# Altium PCB PCB1.PcbDoc
Units mil, origin at the board's own origin, x right, y up, seen from the top; angles counter-clockwise.
Board outline 2570 x 1780 mil, 2 copper layers (Top Layer, Bottom Layer); 44 components, 24 nets, 125 pads, 22 vias.
Unrouted connection lines stored in the file: 1.
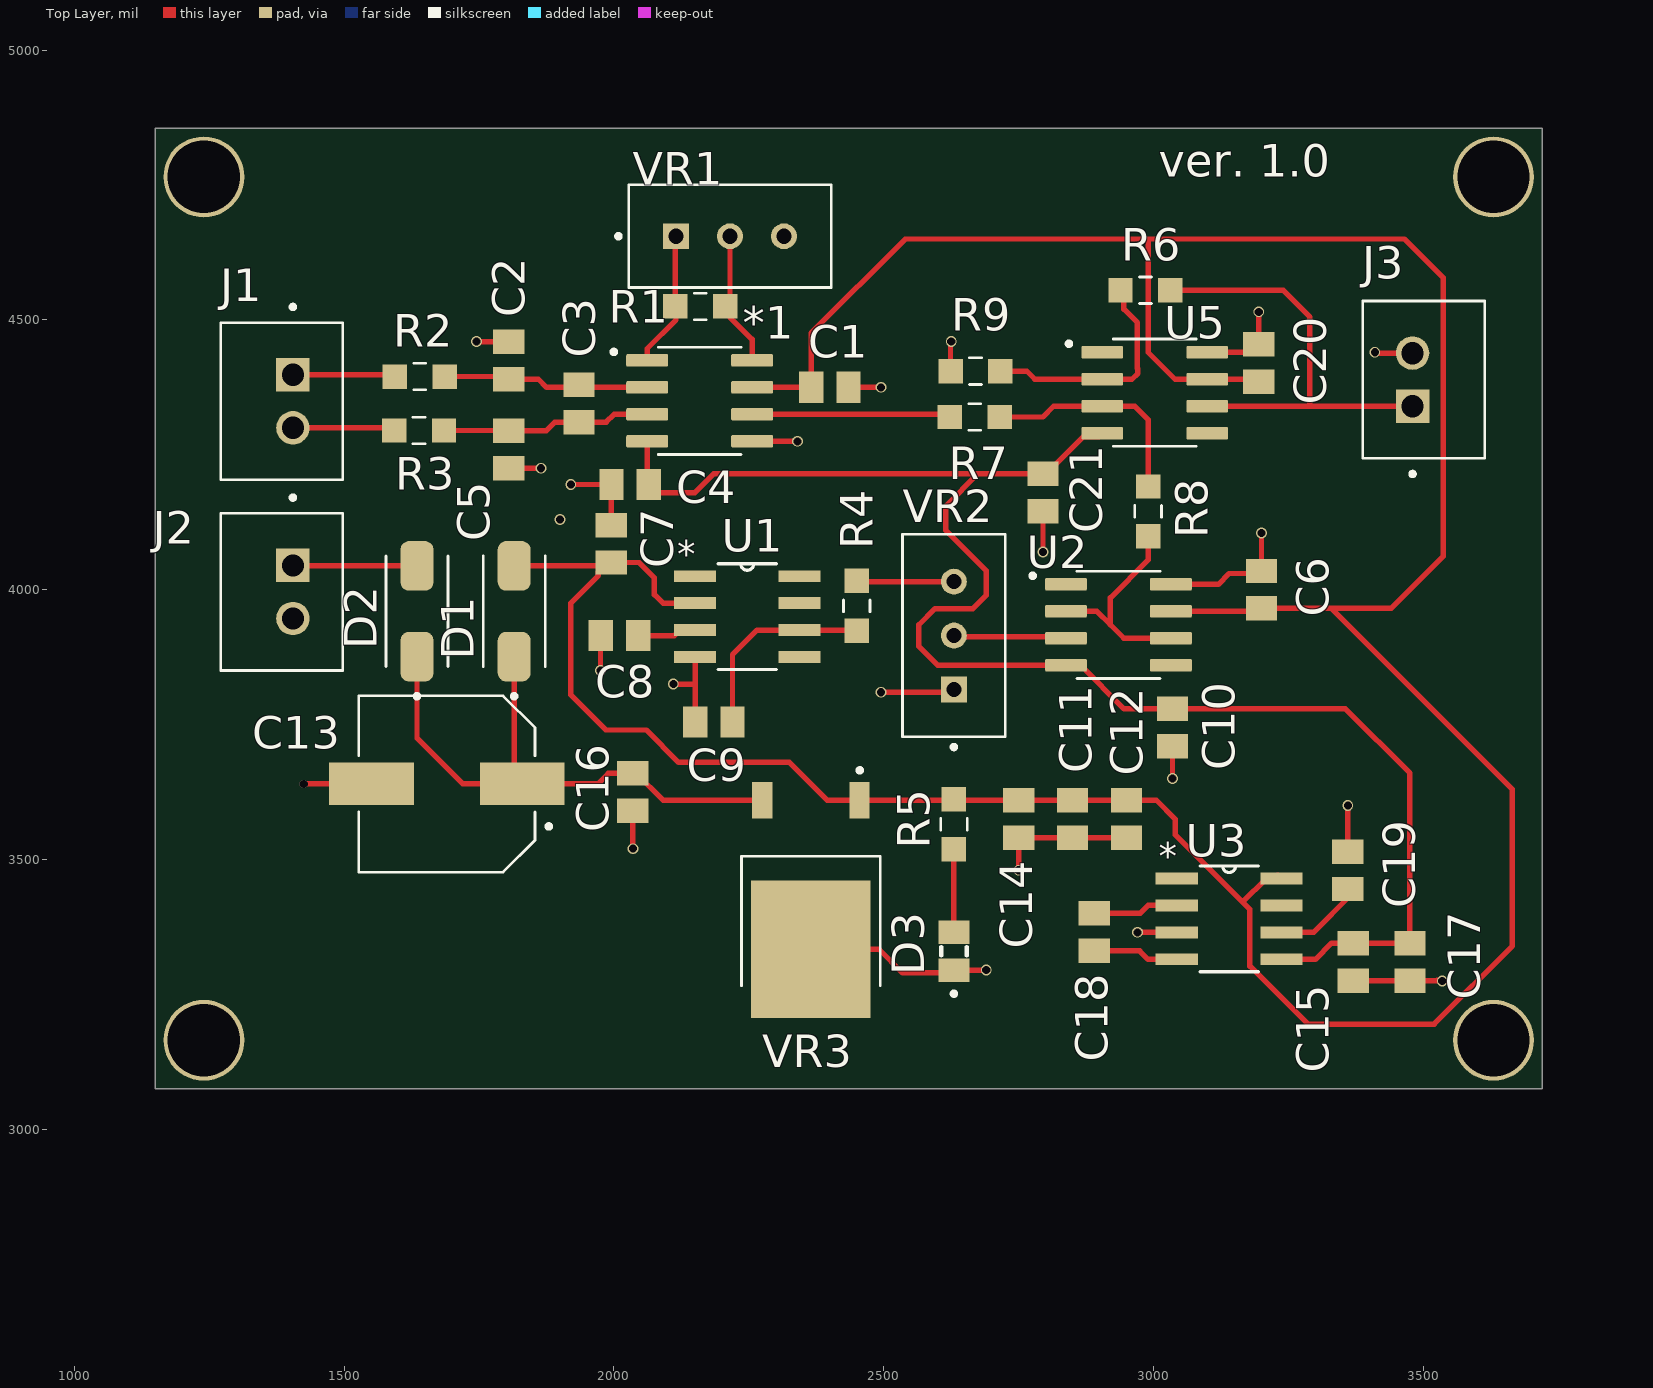
[diagram p0: Top Layer view]
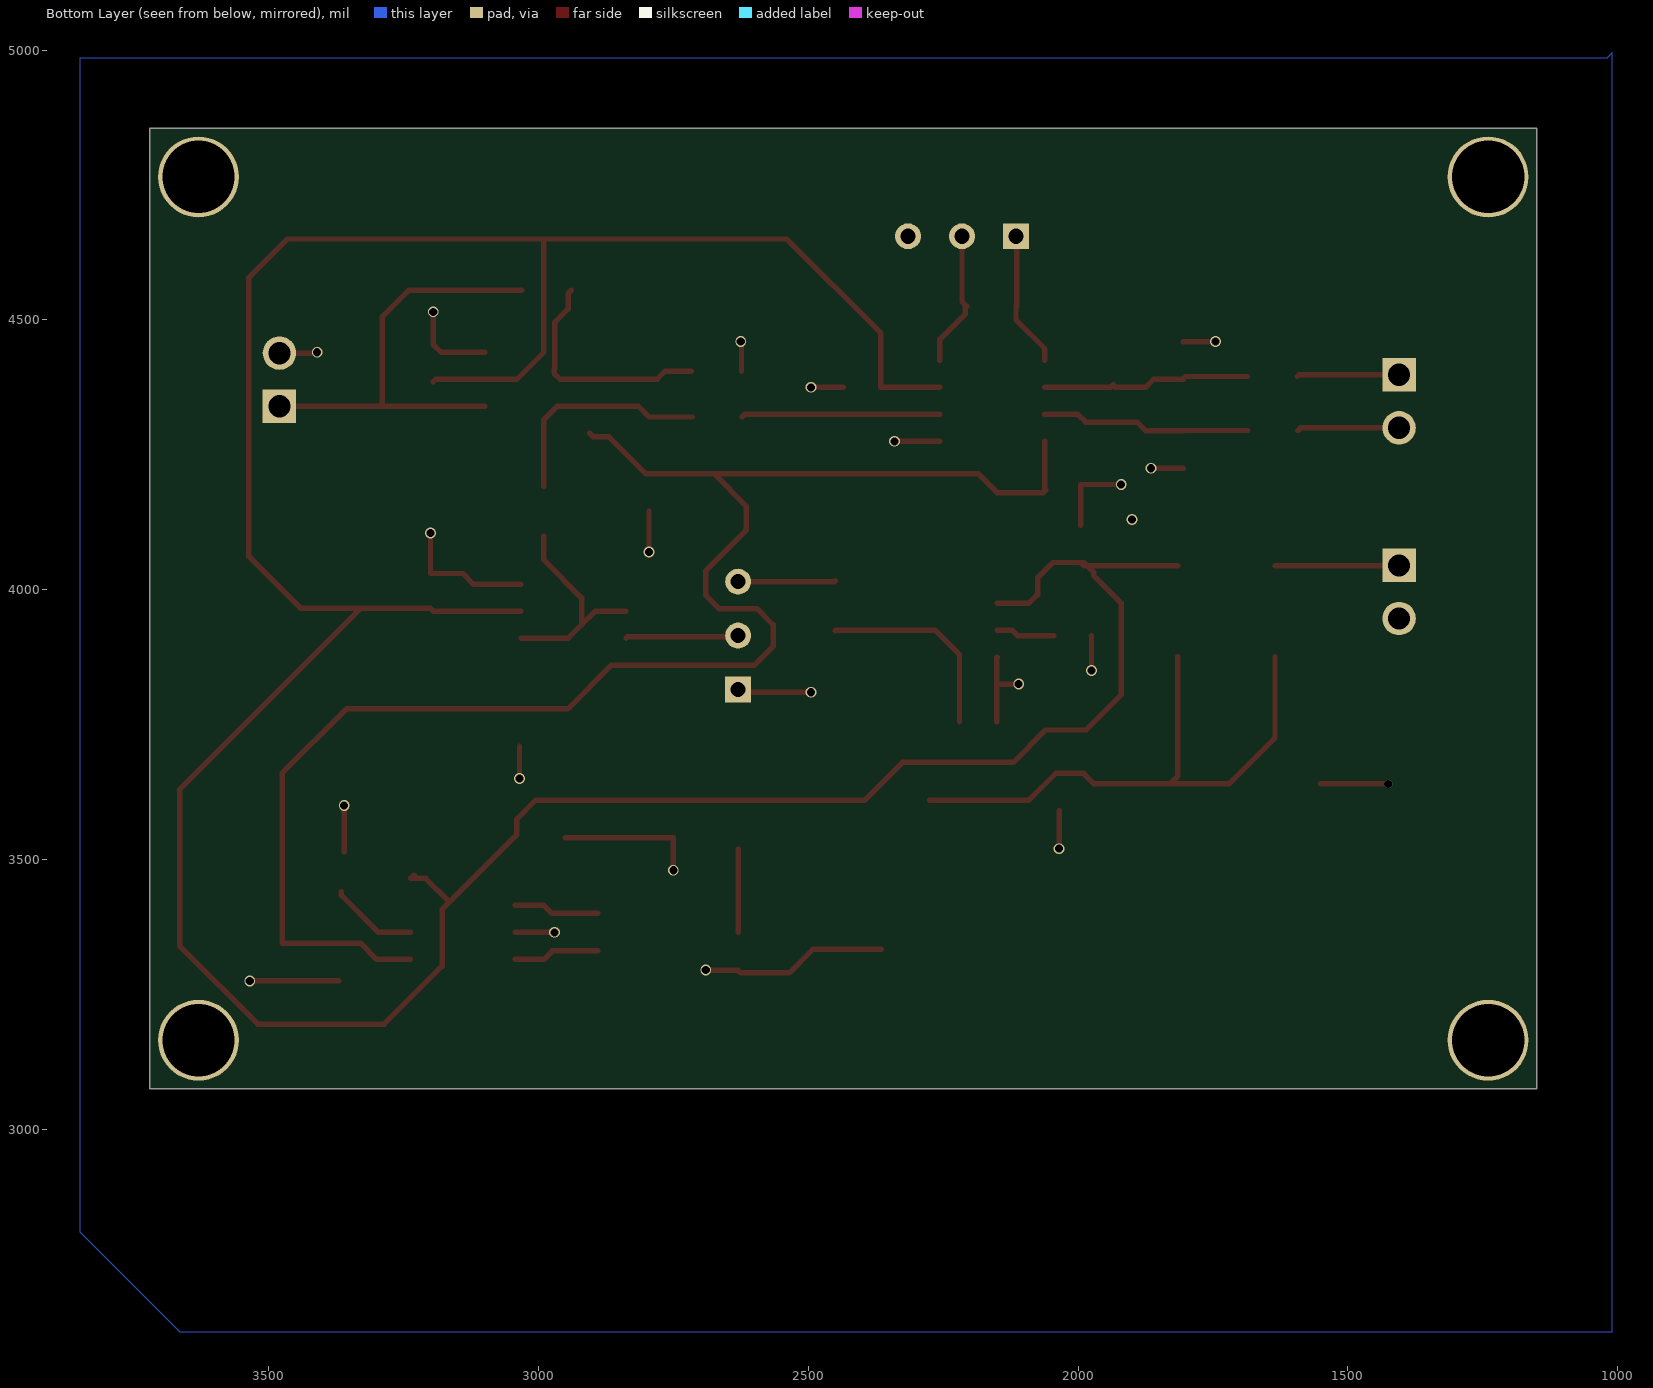
[diagram p1: Bottom Layer view, seen from below]
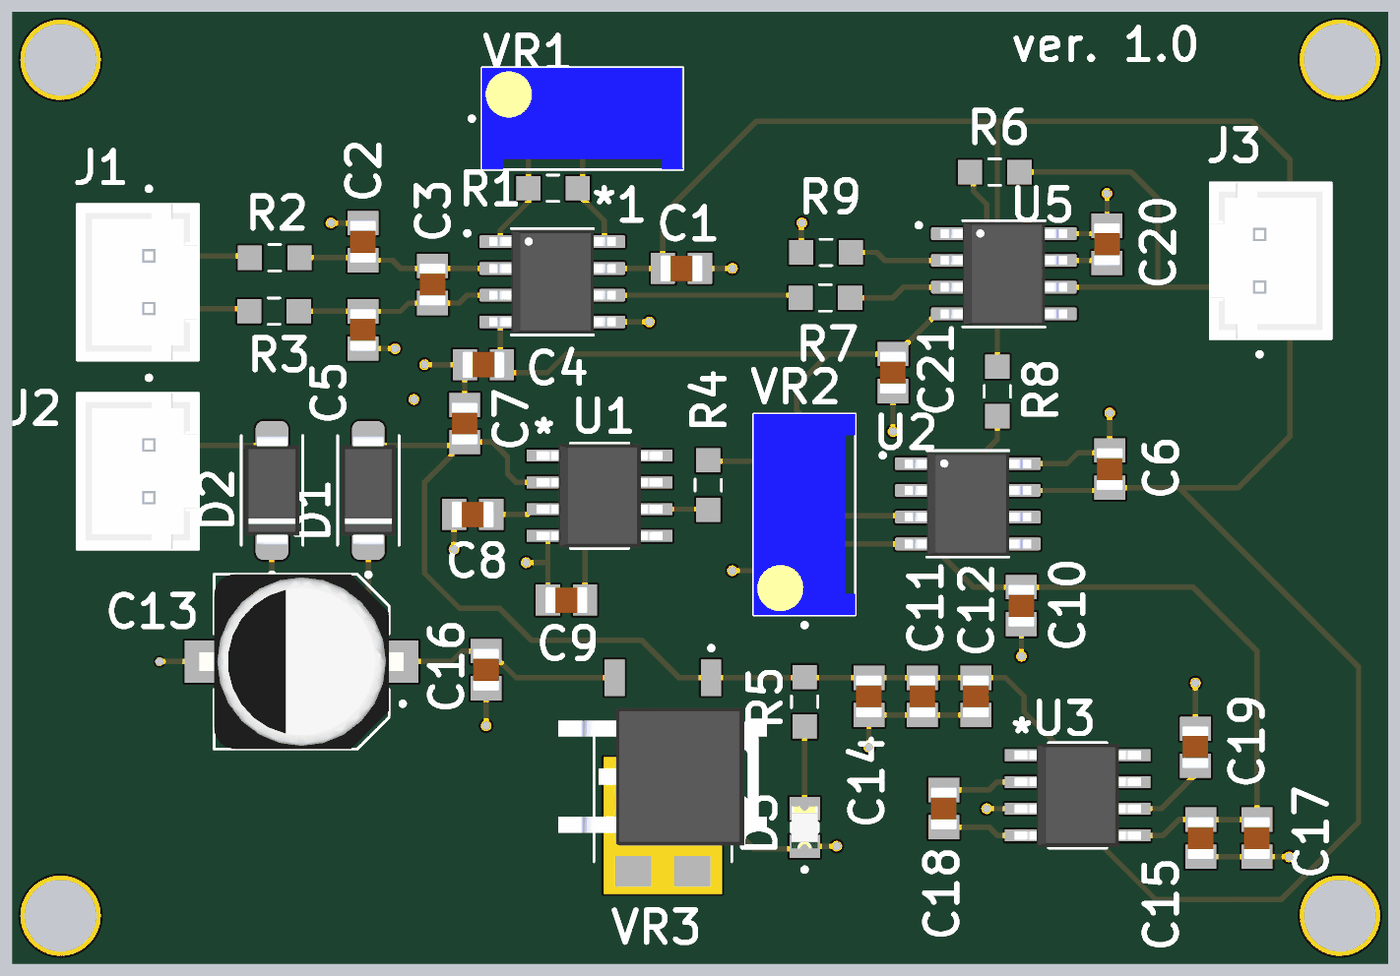
[diagram p2: 3D render of the assembled board from above, using the file's embedded part models]

## Layer stack, top to bottom
Top Solder: solder mask 0.4, Solder Resist, Dk 3.5
Top Layer: signal copper 1.4
Dielectric 1: dielectric 12.6, FR-4, Dk 4.8
Bottom Layer: signal copper 1.4
Bottom Solder: solder mask 0.4, Solder Resist, Dk 3.5

## Board outline
1150,3075 3720,3075 3720,4855 1150,4855

## Design rules (kind name [scope] priority, off if disabled: settings)
Clearance [All] p1: gap=10 ignorepadtopadclearanceinfootprint=FALSE
PolygonConnect [All] p1: connectstyle=Relief reliefconductorwidth=10 reliefentries=4 polygonreliefangle="90 Angle" airgapwidth=10
RoutingVias [All] p1: holewidth=28 width=50 viastyle="Through Hole" minholewidth=28 minwidth=50 maxholewidth=28 maxwidth=50
SolderMaskExpansion [All] p1: expansion=4 istentingtop=FALSE
SupplyNets "Schematic Supply Nets_2" [InNet('GND')] p1: voltage=0.000
SupplyNets "Schematic Supply Nets_1" [InNet('VCC')] p2: voltage=0.000
SupplyNets "Schematic Supply Nets" [InNet('VEE')] p3: voltage=0.000
Width [All] p1: maxlimit=10 minlimit=10 preferedwidth=10
30 further rules are at their usual default settings.

## Classes and differential pairs
component class U_Sheet5: C20 C21 J3 R6 R7 R8 R9 U5
component class U_Sheet3: C11 C12 C13 C14 C15 C16 C17 C18 C19 D1 D2 D3 J2 R5 U3 VR3
component class U_Sheet2: C6 C7 C8 C9 C10 R4 U1 U2 VR2
component class U_Sheet1: *1 C1 C2 C3 C4 C5 J1 R1 R2 R3 VR1

## Components (designator, comment, footprint, x,y, rotation, side; value= is the part's Value field where it differs from the comment)
*1 "INA118" SOIC127P599X175-8N 2158.74,4350 r0 top
C1 "Capacitor" CAPC2012X150N 2400,4375 r0 top value=10u
C2 "Capacitor" CAPC2012X150N 1805,4425 r90 top value=10nF
C3 "Capacitor" CAPC2012X150N 1935,4345 r90 top value=0.047u
C4 "Capacitor" CAPC2012X150N 2030,4195 r180 top value=0
C5 "Capacitor" CAPC2012X150N 1805,4260 r90 top value=10nF
C6 "Capacitor" CAPC2012X150N 3200,4000 r90 top value=0.1u
C7 "Capacitor" CAPC2012X150N 1995,4085 r270 top value=10u
C8 "Capacitor" CAPC2012X150N 2010,3915 r0 top value=100nF
C9 "Capacitor" CAPC2012X150N 2185,3755 r0 top value=10u
C10 "Capacitor" CAPC2012X150N 3035,3744.65 r270 top value=0.1u
C11 "Capacitor" CAPC2012X150N 2850,3575 r270 top value=10uF
C12 "Capacitor" CAPC2012X150N 2950,3575 r90 top value=0.1uF
C13 "220uF" CAP_EEEFT1V331AP 1690.24,3640 r180 top
C14 "Capacitor" CAPC2012X150N 2750,3575 r270 top value=330n
C15 "Capacitor" CAPC2012X150N 3370,3310 r90 top value=10uF
C16 "Capacitor" CAPC2012X150N 2035,3625 r270 top value=330nF
C17 "Capacitor" CAPC2012X150N 3475,3310 r90 top value=0.1uF
C18 "Capacitor" CAPC2012X150N 2890,3365.35 r90 top value=10u
C19 "Capacitor" CAPC2012X150N 3360,3480 r270 top value=0.1u
C20 "Capacitor" CAPC2012X150N 3195,4420 r270 top value=0.1u
C21 "Capacitor" CAPC2012X150N 2795,4180.35 r90 top value=0.1u
D1 "B340A-13-F" DIOM5226X240N 1815,3960 r90 top
D2 "B340A-13-F" DIOM5226X240N 1635,3960 r90 top
D3 "597-3305-607F" LEDC2012X70N 2630,3330 r90 top
J1 "Inp" JST_B2B-XH-A_(LF)(SN) 1384.33,4349.21 r90 top
J2 "PWR" JST_B2B-XH-A_(LF)(SN) 1384.33,3995.79 r90 top
J3 "OUTP" JST_B2B-XH-A_(LF)(SN) 3500.67,4389.21 r270 top
R1 "Resistor" RES_ERA6AHD330V 2160,4525 r180 top value=100K
R2 "Resistor" RES_ERA6AHD330V 1640,4395 r0 top value=1K
R3 "Resistor" RES_ERA6AHD330V 1638.74,4295 r0 top value=1K
R4 "Resistor" RES_ERA6AHD330V 2450,3970 r90 top value=10K
R5 "Resistor" RES_ERA6AHD330V 2630,3565 r90 top value=2k2
R6 "Resistor" RES_ERA6AHD330V 2985,4555 r0 top value=10K
R7 "Resistor" RES_ERA6AHD330V 2668.74,4320 r180 top value=10K
R8 "Resistor" RES_ERA6AHD330V 2990,4145 r90 top value=10K
R9 "Resistor" RES_ERA6AHD330V 2670,4405 r0 top value=10K
U1 "AD780BRZ" SOIC127P600X175-8N 2247,3950 r0 top
U2 "TLC271ACDR" SOIC127P599X175-8N 2935,3935 r0 top
U3 "ICL7660ISA-T" SOIC127P600X175-8N 3140,3390 r0 top
U5 "TLC271ACDR" SOIC127P599X175-8N 3002.24,4365 r0 top
VR1 "100k" TRIM_3296W-1-103RLF 2215,4655 r0 top
VR2 "1k" TRIM_3296W-1-103RLF 2630,3915 r90 top
VR3 "LM78M05CDT/NOPB" TO228P991X255-3N 2364.96,3424.96 r270 top

## Footprints (in the part's own frame and the unit in brackets; to place one, negate y for a bottom-side part, rotate by r counter-clockwise, add the part's x,y. Pads: shape width x height; smd on the part's side, far side on the other; paste and mask are expansions set on the pad)
CAP_EEEFT1V331AP [mm]
  rect 4x2 smd: 1(-3.55,0) 2(3.55,0)
  silkscreen extent -4.9,-4.15 4.15,4.15, body extent -4.85,-4.15 4.85,4.15, height 10.2
CAPC2012X150N [mm]
  rect 1.15x1.47 smd: 1(-0.88,0) 2(0.88,0)
  body extent -1,-0.63 1,0.63, height 1.5
DIOM5226X240N [mm]
  rrect50% 2.33x1.55 smd: A(2.135,0) C(-2.135,0)
  silkscreen extent -4.1,-1.46 2.6,1.46, body extent -2.6,-1.3 2.6,1.3, height 2.4
JST_B2B-XH-A_(LF)(SN) [mm]
  rect 1.575x1.575 / inner round 1.575 / far side rect 1.575x1.575 hole 1.05: 1(1.25,-0.525)
  round 1.575 hole 1.05: 2(-1.25,-0.525)
  silkscreen extent -3.7,-2.88 4.54,2.88, body extent -3.7,-2.88 3.7,2.88, height 7
LEDC2012X70N [mm]
  rect 1.1x1.45 smd: A(0.9,0) C(-0.9,0)
  silkscreen extent -2.1,-0.6 0.2,0.6, body extent -1,-0.63 1,0.63, height 0.7
RES_ERA6AHD330V [mm]
  rect 1.15x1.15 smd: 1(-1.175,0) 2(1.175,0)
  silkscreen extent -0.28,-0.63 0.28,0.63
SOIC127P599X175-8N [mm]
  rrect25% 1.97x0.6 smd: 1(-2.47,1.905) 2(-2.47,0.635) 3(-2.47,-0.635) 4(-2.47,-1.905) 5(2.47,-1.905) 6(2.47,-0.635) 7(2.47,0.635) 8(2.47,1.905)
  silkscreen extent -4.14,-2.52 1.95,2.52, body extent -3,-2.45 3,2.45, height 1.75
SOIC127P600X175-8N [mil]
  rect 78x22 smd: 1(-97,75) 2(-97,25) 3(-97,-25) 4(-97,-75) 5(97,-75) 6(97,-25) 7(97,25) 8(97,75)
  silkscreen extent -54,-98 54,98, body extent -118,-96 118,96, height 69
TO228P991X255-3N [mm]
  rect 1.73x0.96 smd: 1(-4.7,2.285) 3(-4.7,-2.285)
  rect 6.49x5.63 smd paste-4: 4(2.32,0)
  silkscreen extent -6.2,-3.27 4.04,3.27, body extent -3.27,-4.95 3.27,4.95, height 2.55
TRIM_3296W-1-103RLF [mm]
  rect 1.218x1.218 / inner round 1.218 / far side rect 1.218x1.218 hole 0.71: 1(-2.54,0)
  round 1.218 hole 0.71: 2(0,0) 3(2.54,0)
  silkscreen extent -5.35,-2.41 4.76,2.42, body extent -4.76,-2.41 4.76,2.42, height 11.55

## Part data
C13: library part EEEFT1V331AP, "Capacitor,Alum Electrolytic,Cap 330 uF,Tol 20%,Vol-Rtg 35 VDC,SMT,8x10.2,TR", Package="RADIAL-2 Panasonic", Check_prices=https://www.snapeda.com/parts/EEE-FT1V331AP/Panasonic/view-part/?ref=eda, MF="Panasonic Electronic", MP=EEE-FT1V331AP, SnapEDA_Link=https://www.snapeda.com/parts/EEE-FT1V331AP/Panasonic/view-part/?ref=snap
D1 D2: "Schottky Diode 3A 40V 0.5Vf SMA", Package="DO-214 Diodes Inc.", Check_prices=https://www.snapeda.com/parts/B340A-13-F/Diodes+Inc./view-part/?ref=eda, MF="Diodes Inc.", MP=B340A-13-F, SnapEDA_Link=https://www.snapeda.com/parts/B340A-13-F/Diodes+Inc./view-part/?ref=snap
D3: "LED Uni-Color Green 4-Pin Chip 0805 T/R", Package=None, Availability=Unavailable, MP=597-3305-607F, Price=None
J2 J3: library part Outp
U1: "2.5 V/3.0 V High Precision Reference", Package="SOIC-8 Analog Devices", Check_prices=https://www.snapeda.com/parts/AD780BRZ/Analog+Devices/view-part/?ref=eda, MF="Analog Devices", MP=AD780BRZ, SnapEDA_Link=https://www.snapeda.com/parts/AD780BRZ/Analog+Devices/view-part/?ref=snap
U2 U5: "Single, 16-V, 2-MHz, 5-mV offset voltage, In to V- operational amplifier", Package="SOIC-8 Texas Instruments", Check_prices=https://www.snapeda.com/parts/TLC271ACDR/Texas+Instruments/view-part/?ref=eda, MF="Texas Instruments", MP=TLC271ACDR, SnapEDA_Link=https://www.snapeda.com/parts/TLC271ACDR/Texas+Instruments/view-part/?ref=snap
U3: "Switched-Capacitor Voltage Converters", Package="SOIC-8 Maxim", Check_prices=https://www.snapeda.com/parts/ICL7660ISA+/Analog+Devices/view-part/?ref=eda, MF="Analog Devices", MP=ICL7660ISA+, SnapEDA_Link=https://www.snapeda.com/parts/ICL7660ISA+/Analog+Devices/view-part/?ref=snap
VR1 VR2: library part 3296W-1-103RLF, "Trimmer, Cermet, Rest 10 Kilohms, PCB, 25 Turns, Pwr-Rtg 0.5W", Package="NON STANDARD-3 Bourns", Check_prices=https://www.snapeda.com/parts/3296W-1-103RLF/Bourns/view-part/?ref=eda, MF=Bourns, MP=3296W-1-103RLF, SnapEDA_Link=https://www.snapeda.com/parts/3296W-1-103RLF/Bourns/view-part/?ref=snap
VR3: "500-mA, 35-V, linear voltage regulator for 5 V", Package="TO-252-3 Texas Instruments", Check_prices=https://www.snapeda.com/parts/LM78M05CDT/NOPB/Texas+Instruments/view-part/?ref=eda, MF="Texas Instruments", MP=LM78M05CDT/NOPB, SnapEDA_Link=https://www.snapeda.com/parts/LM78M05CDT/NOPB/Texas+Instruments/view-part/?ref=snap
C1 C2 C3 C4 C5 C6 C7 C8 C9 C10 C11 C12 C14 C15 C16 C17 C18 C19 C20 C21: SimulationGenericComponent=True
R1 R2 R3 R4 R5 R6 R7 R8 R9: SimulationGenericComponent=True, TC1=0, TC2=0

## Free pads (board coordinates)
  round 150 hole 134: 2(3630,4765) 4(3630,3165) 5(1240,3165) 6(1240,4765)

## Via types
v1: diameter 20, hole 15, Top Layer to Bottom Layer, 21 vias
v2: diameter 15, hole 15, Top Layer to Bottom Layer, 1 vias

## Nets (pads, with @x,y where several pads share a name; then routed paths per layer and width w, separated by ;. In a path a pad name is that pad's centre, name@x,y a point inside that pad or via, vN(x,y) a via of type N, cw(c..) or ccw(c..) an arc to the next point about the centre after c; other vN are vias at no path point)
GND: *1.5 C1.2 C2.2 C4.2 C5.1 C6.2 C7.1 C8.1 C9.1 C10.2 C11.2 C12.1 C13.2 C14.2 C15.1 C16.2 C17.1 C19.1 C20.1 C21.1 D3.C J2.2 J3.2 R9.1 U1.4 U2.8 U3.3 U5.8 VR2.1 VR3.4 | length 2568.4
  Top Layer w10: v2(1425,3640) C13.2 ; v1(1745,4460) 1745.35,4459.65 C2.2 ; C5.1 1805.35,4225 v1(1865,4225) ; v1(1920,4195) C4.2 1995,4194.65 C7.1 ; v1(1975,3850) 1975,3914.65 C8.1 ; v1(2035,3520) C16.2 ; v1(2110,3825) 2150.35,3825 ; U1.4 2150.35,3874.65 2150.35,3825 ; C9.1 2150.35,3825 ; *1.5 v1(2340,4275) ; VR3.4 2491.38,3333.62 2535,3290 2625.43,3290 D3.C 2684.57,3294.57 v1@2685,3295 ; C1.2 v1(2495,4375) ; v1(2495,3810) 2625,3810 VR2.1 ; R9.1 2623.74,4458.74 v1(2625,4460) ; v1(2750,3480) C14.2 C11.2 C12.1 ; v1(2795,4070) C21.1 ; v1(2970,3365) U3.3 ; U2.8 3120,4010 3140,4030 3200,4030 v1(3200,4105) ; v1(3035,3650) C10.2 ; U5.8 3180.35,4440 C20.1 v1(3195,4515) ; C19.1 v1(3360,3600) ; C15.1 C17.1 3525.35,3275.35 3525.86,3275.86 3534.14,3275.86 v1(3535,3275) ; v1@3415,4440 3416.57,4438.43 J3.2
  other v1: 2690,3295 1900,4130 3410,4440
Net*1_1: *1.1 R1.2 VR1.1 | length 252.7
  Top Layer w10: *1.1 2061.5,4446.5 2115,4500 R1.2@2115,4525 ; R1.2 2113.74,4653.74 VR1.1
Net*1_2: *1.2 C2.1 C3.2 R2.2 | length 387.4
  Top Layer w10: R2.2 1800.35,4395 C2.1 1859.65,4390.35 1875,4375 1930.35,4375 C3.2 1939.65,4375 *1.2
Net*1_3: *1.3 C3.1 C5.2 R3.2 | length 389.2
  Top Layer w10: R3.2 1804.65,4295 C5.2 1874.65,4294.65 1890.35,4310.35 C3.1 1985.35,4310.35 2000,4325 *1.3
Net*1_6: *1.6 R7.2 | length 368.6
  Top Layer w10: *1.6 2617.48,4325 R7.2
Net*1_8: *1.8 R1.1 VR1.2 VR1.3 | length 253.2
  Top Layer w10: R1.1 2215,4533.74 VR1.2 ; R1.1@2208.74,4525 2208.74,4511.26 2255.98,4464.02 *1.8
NetC8_2: C8.2 U1.3 | length 109.5
  Top Layer w10: C8.2 2112,3915 2122,3925 U1.3
NetC9_2: C9.2 R4.1 U1.6 | length 374.3
  Top Layer w10: C9.2 2219.65,3879.65 2265,3925 U1.6 2448.74,3925 R4.1
NetC13_1: C13.1 C16.1 D1.C D2.C VR3.3 | length 1097
  Top Layer w10: D2.C 1635,3725 1720,3640 C13.1 ; D1.C 1815,3655 C13.1 ; VR3.3 2090.94,3610 2041.3,3659.65 C16.1 1989.65,3659.65 1970,3640 C13.1
NetC18_1: C18.1 U3.4 | length 159.5
  Top Layer w10: C18.1 2974.29,3330.71 2990,3315 U3.4
NetC18_2: C18.2 U3.2 | length 159.2
  Top Layer w10: C18.2 2975,3400 2990,3415 U3.2
NetC19_2: C19.2 U3.6 | length 163.1
  Top Layer w10: U3.6 3296.65,3365 3365.35,3433.7 C19.2@3365.35,3440
NetD2_A: D2.A J2.1 | length 230.4
  Top Layer w10: J2.1 1405.94,4044.06 D2.A
NetD3_A: D3.A R5.1 | length 153.3
  Top Layer w10: D3.A R5.1
NetJ1_1: J1.1 R2.1 | length 190.2
  Top Layer w10: J1.1 1590.32,4398.43 R2.1
NetJ1_2: J1.2 R3.1 | length 189.6
  Top Layer w10: J1.2 1587.48,4300 R3.1
NetJ3_1: J3.1 R6.2 U5.6 | length 824.9
  Top Layer w10: R6.2 3240,4555 3289.74,4505.26 3289.74,4340 ; U5.6 3289.74,4340 ; J3.1 3289.74,4340
NetR4_2: R4.2 VR2.3 | length 180.5
  Top Layer w10: R4.2 2451.26,4015 VR2.3
NetR6_1: R6.1 R9.2 U5.2 | length 432.8
  Top Layer w10: R9.2 2765,4405 2780,4390 U5.2 2960,4390 2970.86,4400.86 2970.86,4409.14 2970,4410 2970,4495 2945,4520 2945,4548.74 R6.1
NetR7_1: R7.1 R8.2 U5.3 | length 417.4
  Top Layer w10: R7.1 2795,4320 2815,4340 U5.3 2965,4340 2990,4315 R8.2
NetR8_1: R8.1 U2.2 U2.6 | length 407.9
  Top Layer w10: U2.2 2895,3960 2920,3935 ; R8.1 2990,4055 2920,3985 2920,3935 ; U2.6 2945,3910 2920,3935
NetU2_3: U2.3 VR2.2 | length 209.8
  Top Layer w10: VR2.2 2632.5,3912.5 2835.26,3912.5 U2.3
VCC: *1.7 C1.1 C6.1 C7.2 C11.1 C12.2 C14.1 C20.2 D1.A R5.2 U1.2 U2.7 U3.8 U5.7 VR3.1 | length 6651
  Top Layer w10: D1.A C7.2@1982.4,4044.06 ; U1.2 2090.86,3975 2075,3990.86 2075,4022 2046.65,4050.35 C7.2 ; *1.7 C1.1 2365.35,4475.35 2540,4650 2990,4650 ; U2.7 3194.65,3960 C6.1 3329.65,3965.35 ; C20.2 3190.35,4390 U5.7 3040,4390 2990,4440 2990,4650 ; U3.8@3230.35,3471 U3.8@3236.35,3465 ; U3.8 U3.8@3236.35,3465 ; C7.2@1982.4,4044.06 1988.7,4044.06 C7.2 ; C7.2@1982.4,4044.06 1988.7,4050.35 C7.2 ; C7.2@1982.4,4044.06 1971.06,4032.72 1971.06,4026.42 1920,3975.35 1920,3805 1985,3740 2060,3740 2120,3680 2325,3680 2395,3610 VR3.1 2628.74,3610 2629.09,3609.65 C14.1 C11.1 C12.2 2950.35,3610 3005,3610 3040,3575 3040,3546 3165,3421 ; 2990,4650 3465,4650 3537.07,4577.93 3537.07,4062.07 3440.35,3965.35 3329.65,3965.35 ; 3165,3421 3209,3465 U3.8@3236.35,3465 ; 3165,3421 3178.39,3407.61 3178.39,3302.39 3285.79,3195 3520,3195 3665,3340 3665,3630 3329.65,3965.35
VEE: *1.4 C4.1 C10.1 C15.2 C17.2 C21.2 U2.4 U3.5 U5.4 | length 3024.9
  Top Layer w10: *1.4 2061.5,4186.14 2060,4184.65 2064.65,4180 2150,4180 2185,4215 2675,4215 ; U5.4 2898.19,4283.19 2869.49,4283.19 2801.3,4215 C21.2 2675,4215 ; U3.5 3300,3315 3330,3345 C15.2@3369.65,3345 ; C15.2 C17.2 3475,3660 3355.71,3779.29 C10.1 2945.43,3779.29 2864.72,3860 U2.4 2600,3860 2565,3895 2565,3935 2595,3965 2665,3965 2690,3990 2690,4035 2615,4110 2615,4155 2675,4215
pads on no net: U1.1 U1.5 U1.7 U1.8 U2.1 U2.5 U3.1 U3.7 U5.1 U5.5

## Polygon pours and split planes (outlines as drawn)
GND on Bottom Layer "NONET_L02_P002" (solid, shelved, pour order 2): 1010,4995 1020,4985 3850,4985 3850,2810 3665,2625 1010,2625

## Silkscreen, mask and mechanical layers (free items; w line width, h text height)
Top Overlay:
  text "ver. 1.0" at 3010,4765 h60

## Text inside footprints (layer, text, board x,y; h text height)
U1: Top Overlay "*" at 2117,4042 h50; Mechanical 13 "*" at 2117,4042 h50
U3: Top Overlay "*" at 3010,3482 h50; Mechanical 13 "*" at 3010,3482 h50